# Altium PCB AltiumSTM32_PCB_2.PcbDoc
Units mm, origin at the board's own origin, x right, y up, seen from the top; angles counter-clockwise.
Board outline 35.75 x 35 mm, 4 copper layers (L1(Signal), L2(GND), L3(GND), L4(Signal)), stack 1.57 mm thick; 35 components, 27 nets, 173 pads, 116 vias.
Unrouted connection lines stored in the file: 3.
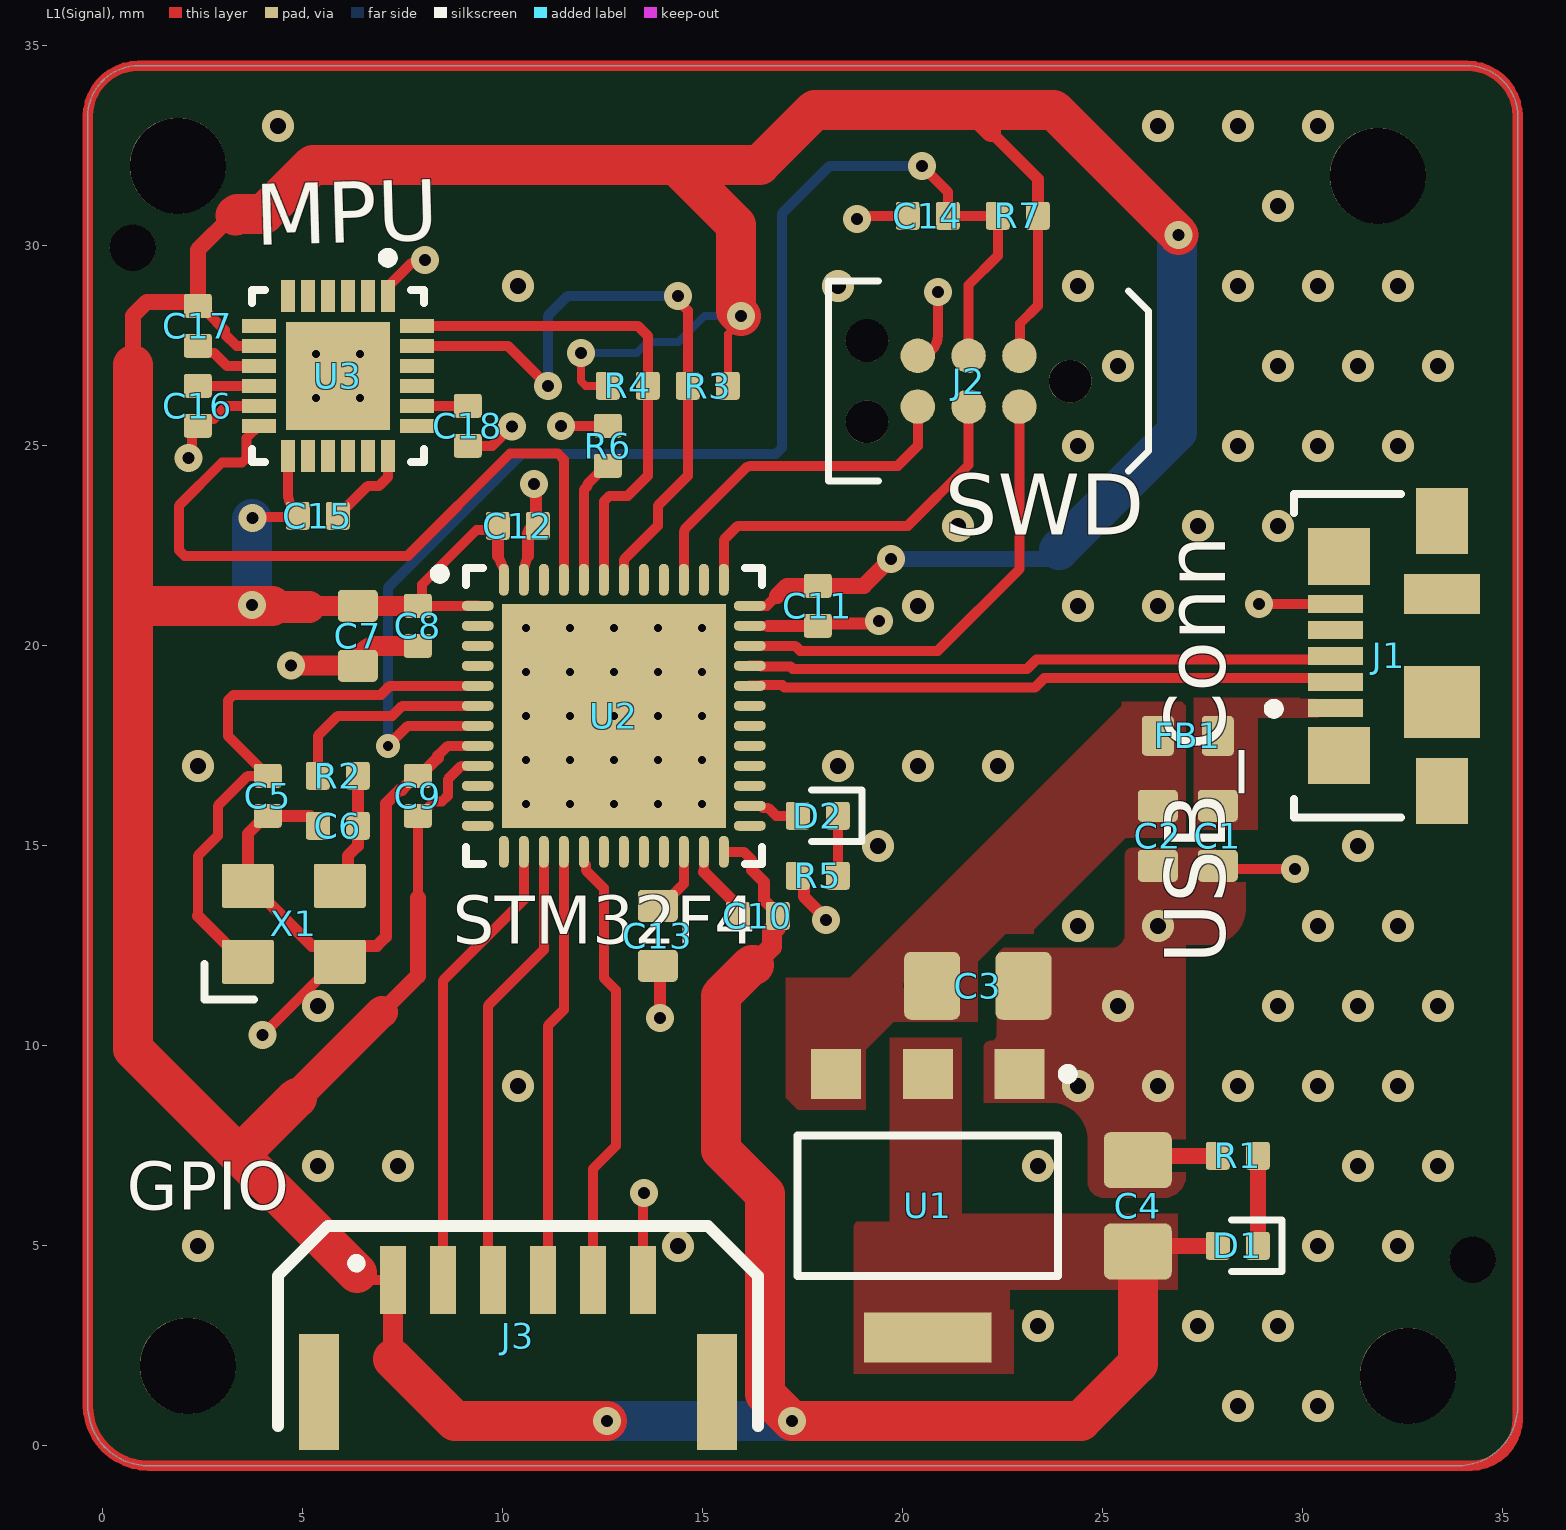
[diagram p0: L1(Signal) view]
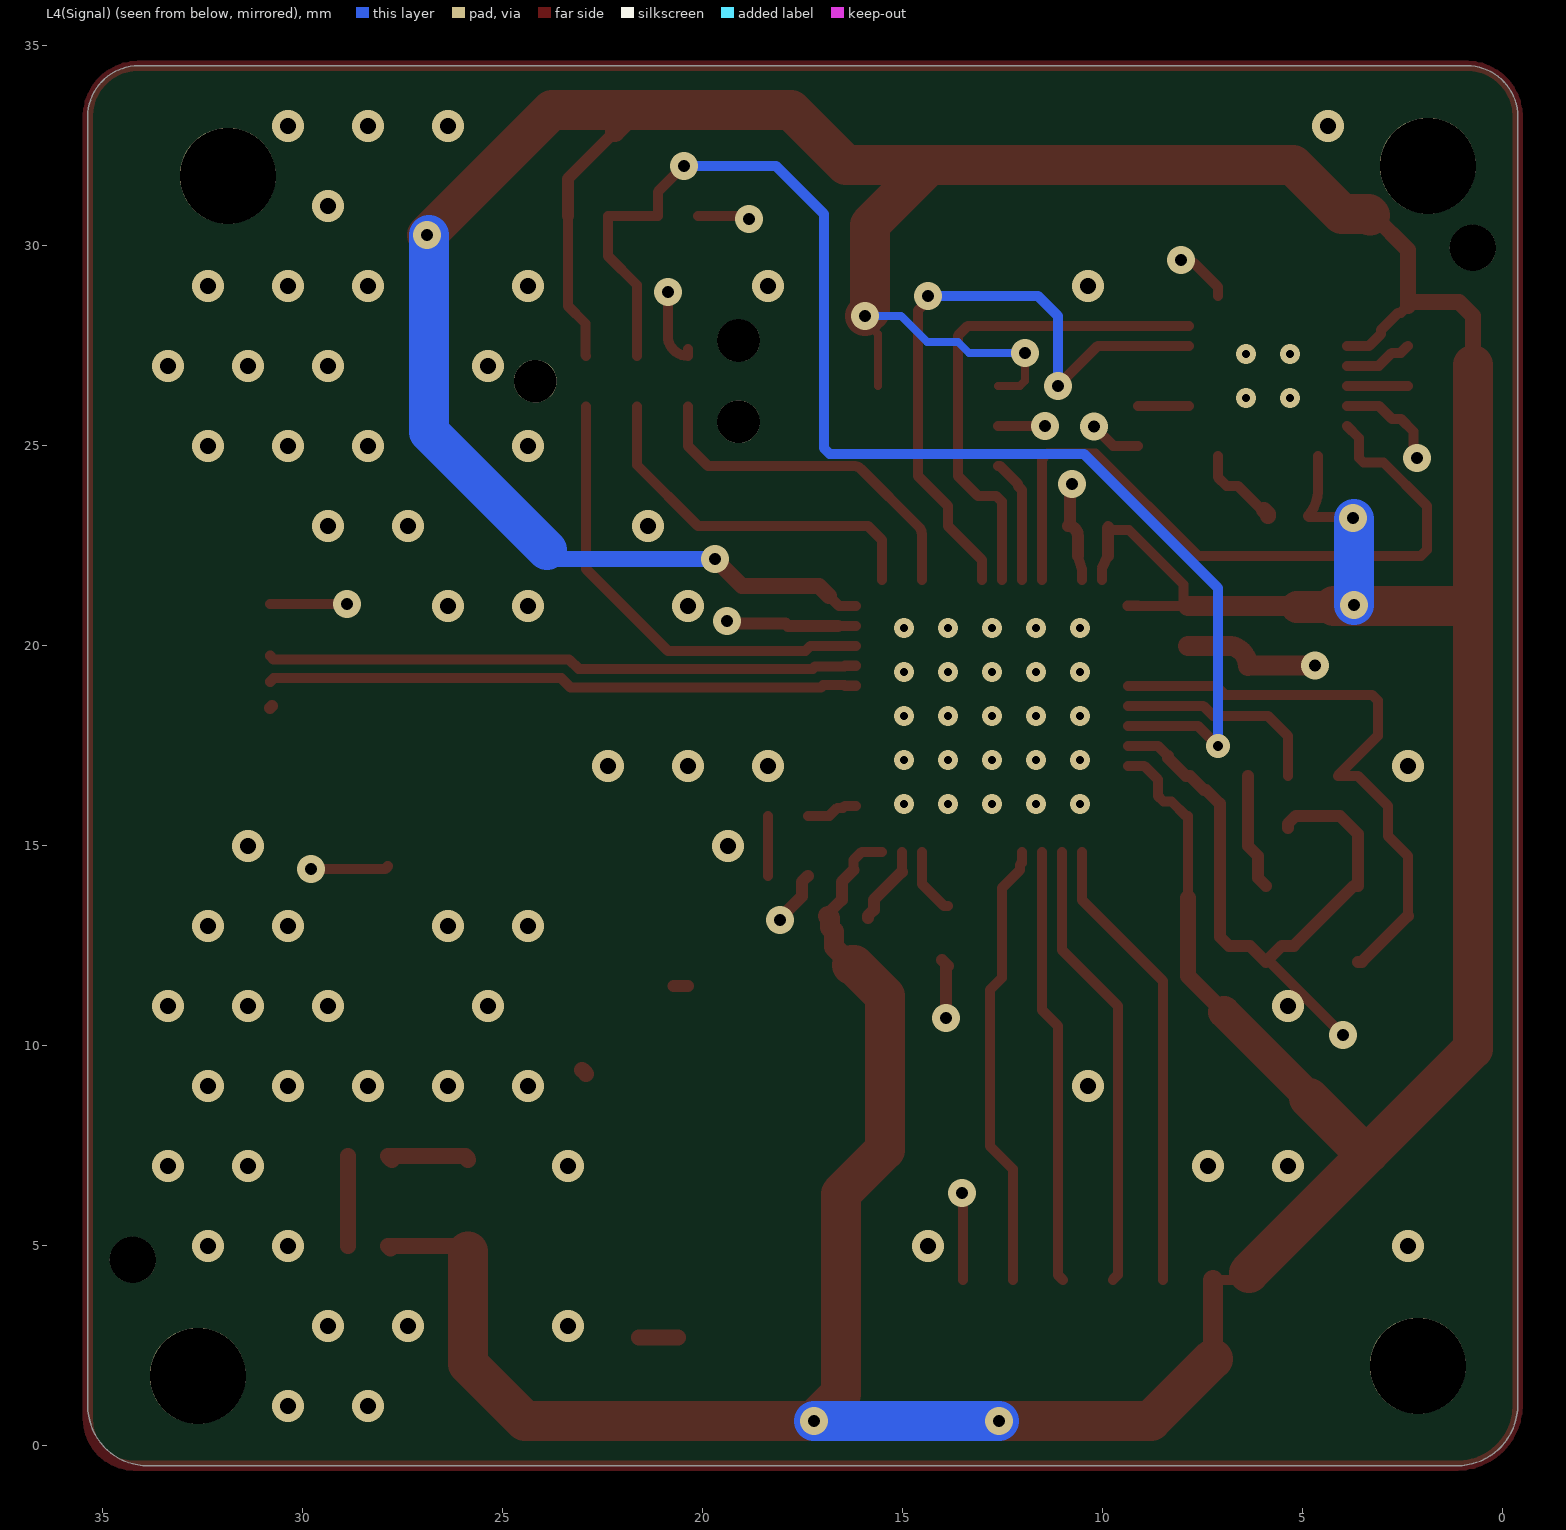
[diagram p1: L4(Signal) view, seen from below]
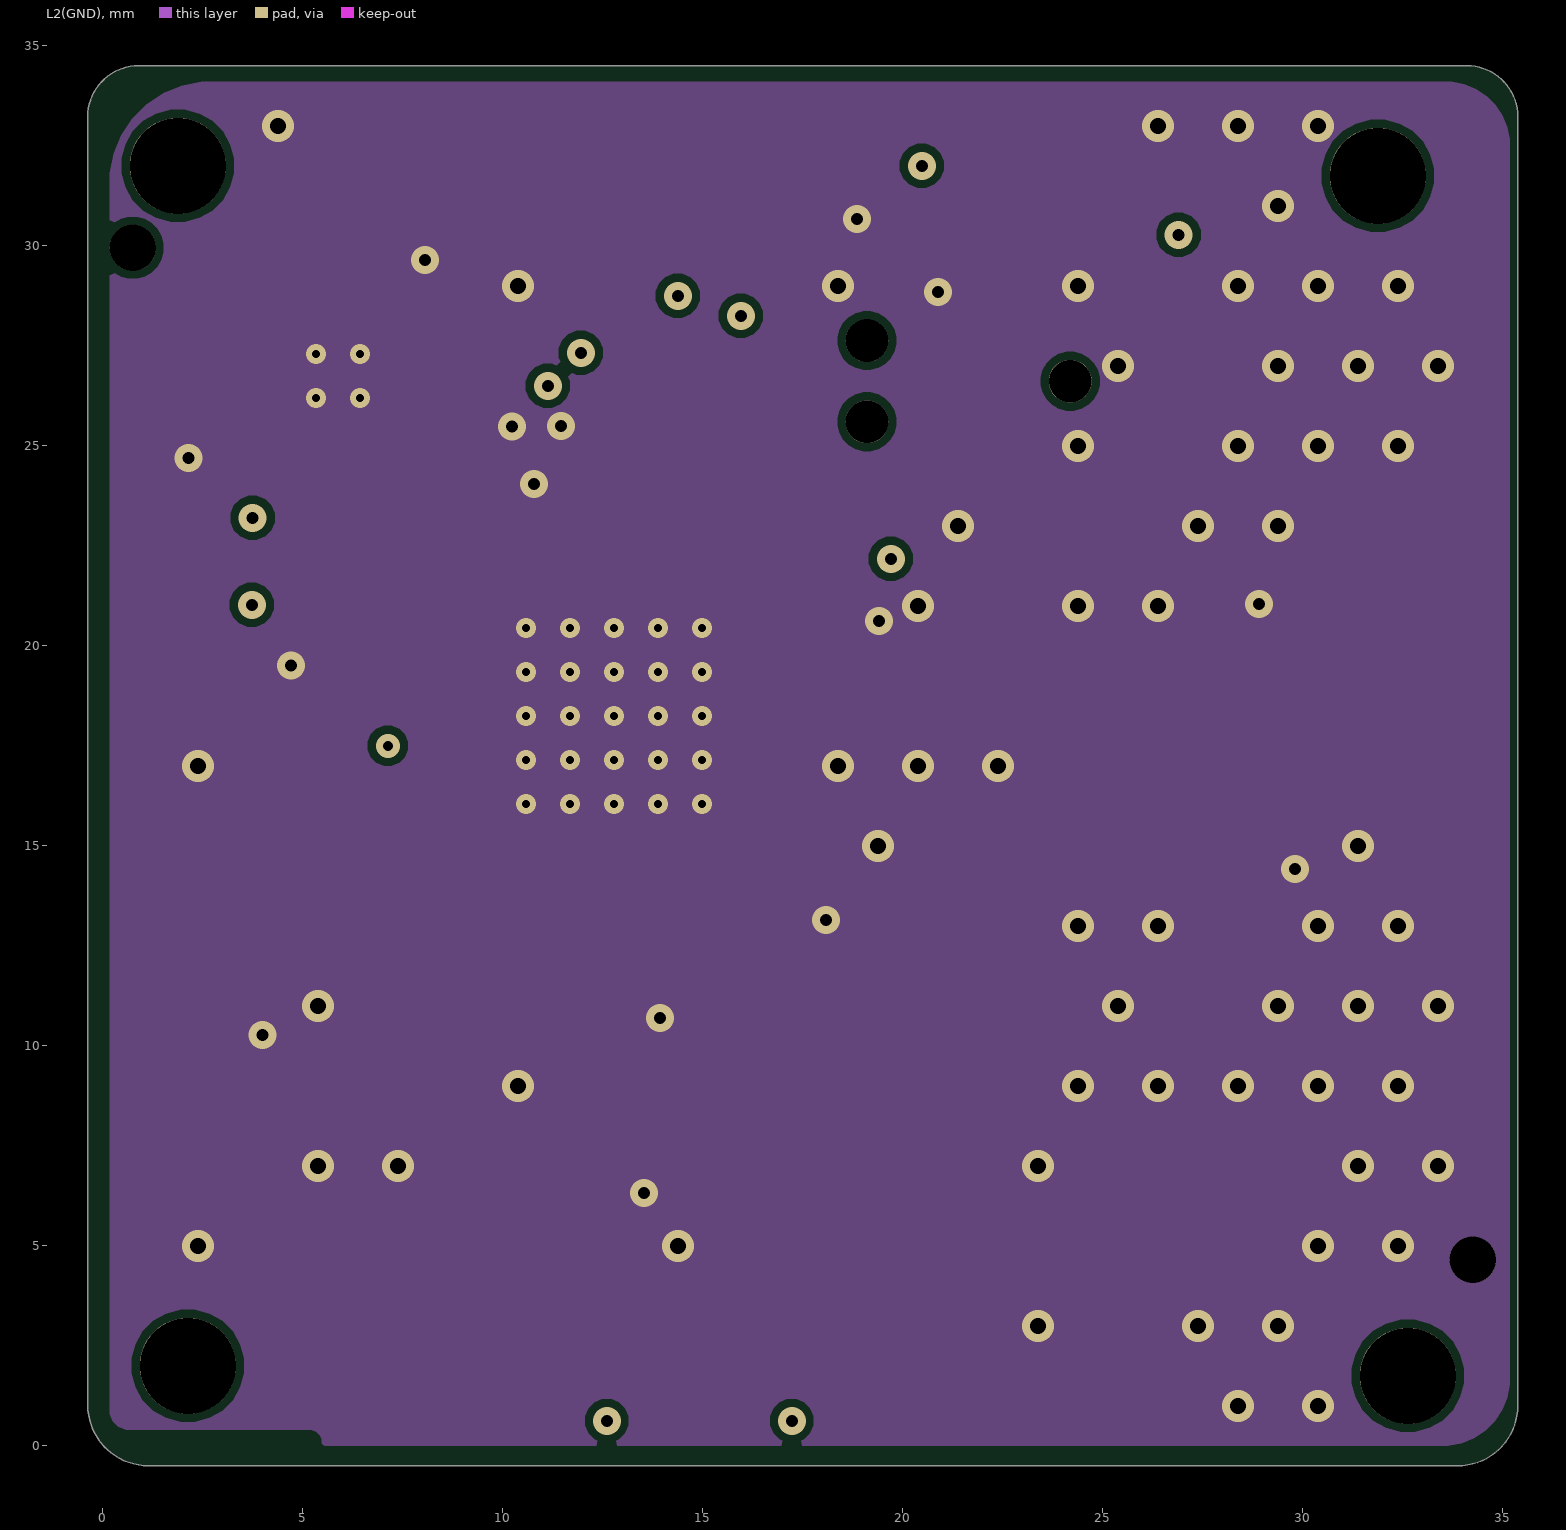
[diagram p2: L2(GND)]
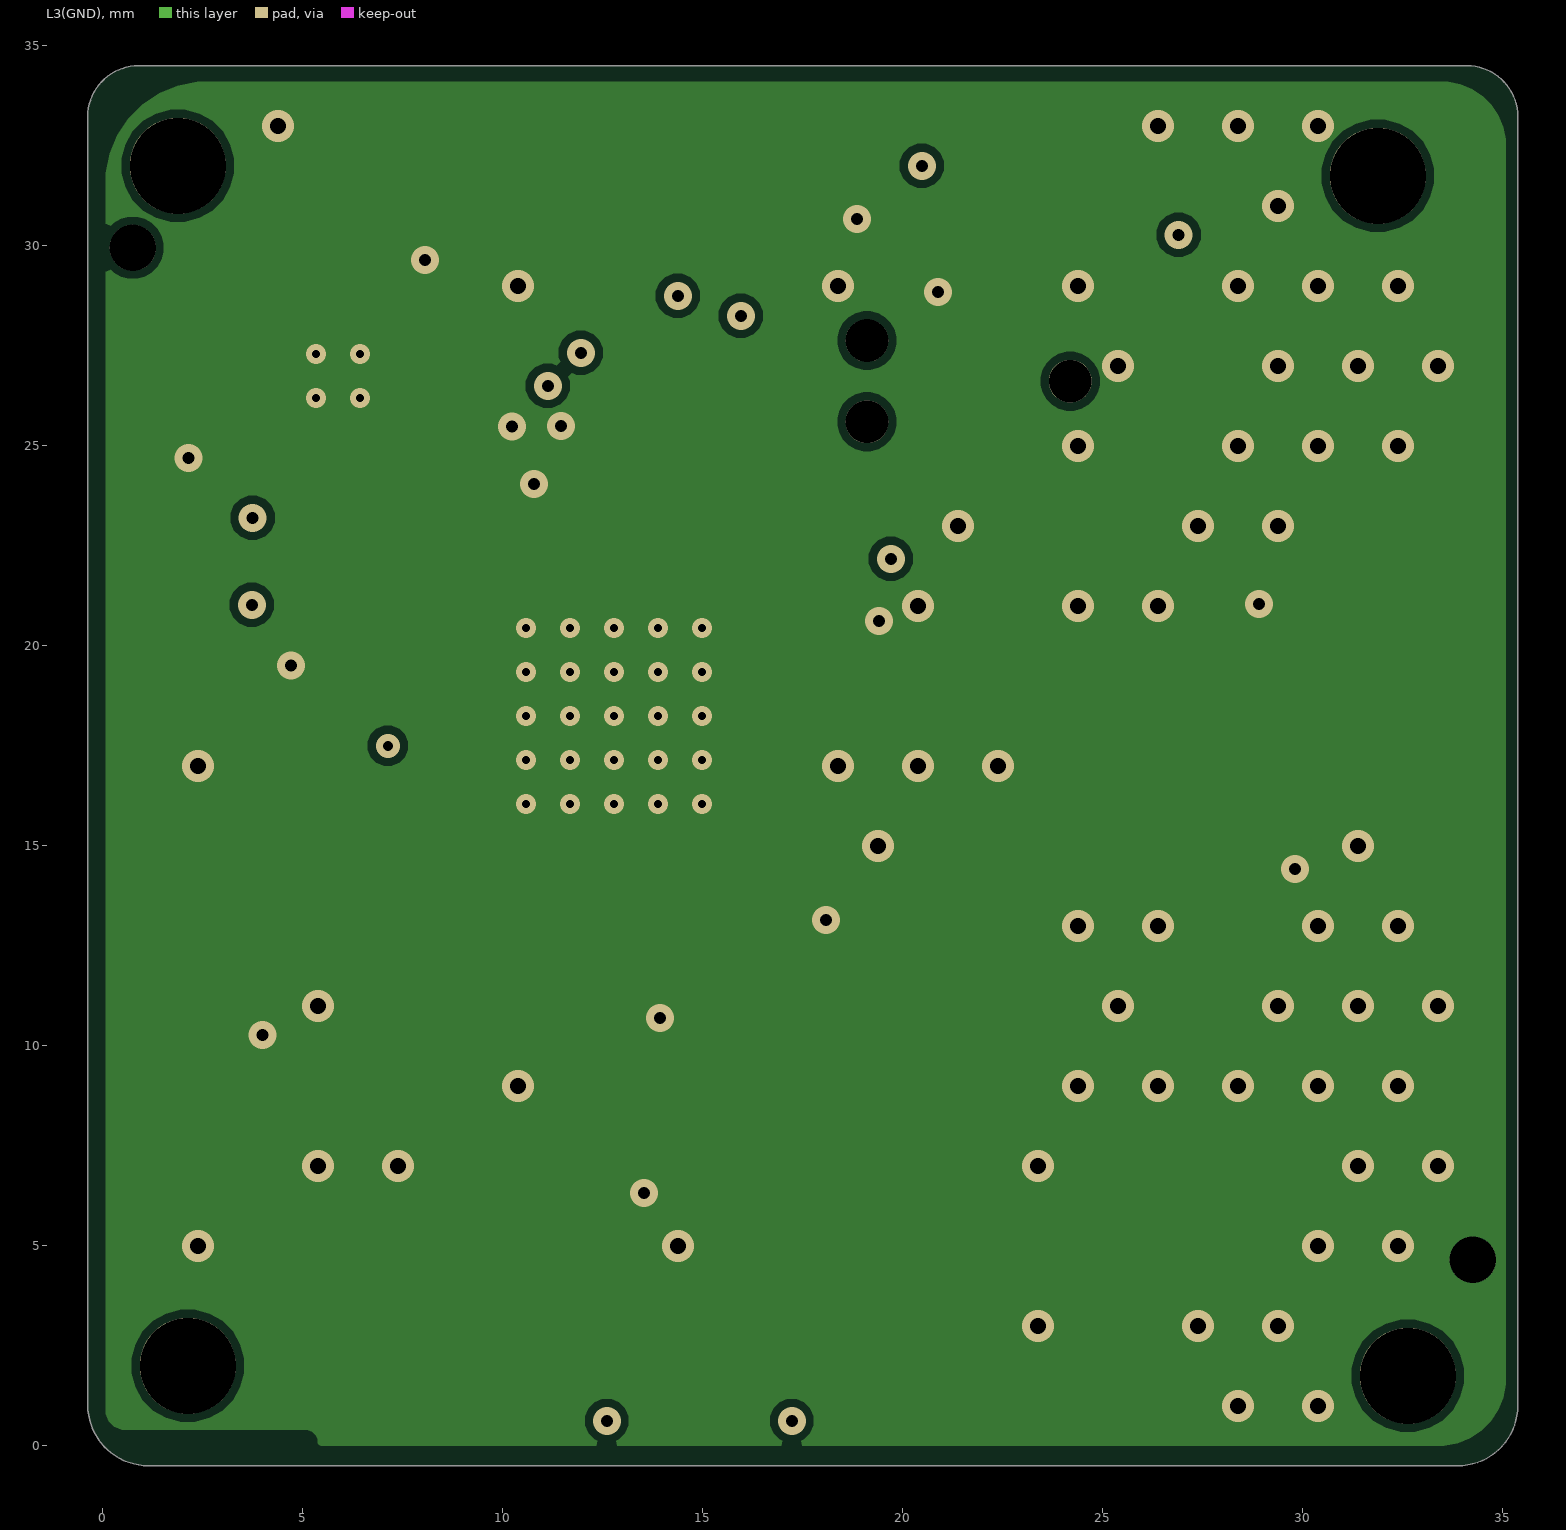
[diagram p3: L3(GND)]
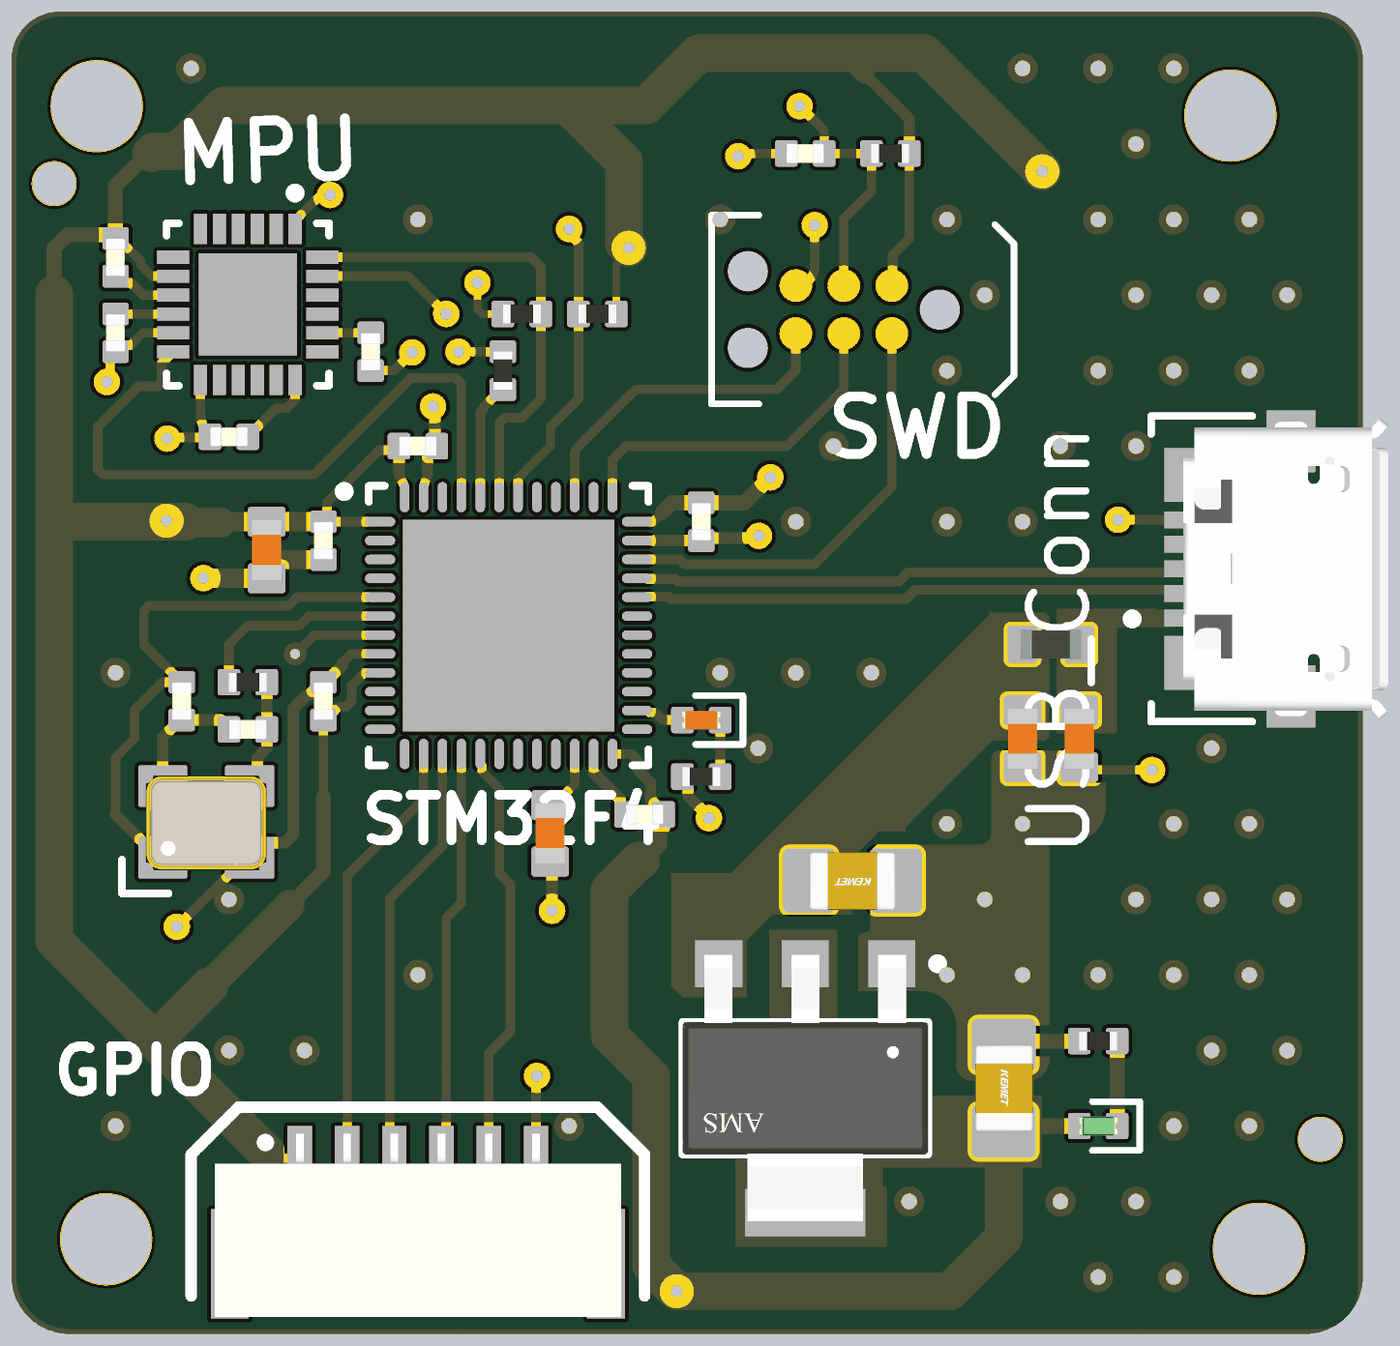
[diagram p4: 3D render of the assembled board from above, using the file's embedded part models]

## Layer stack, top to bottom
Top Solder: solder mask 0.0254, SM-001, Dk 4
L1(Signal): signal copper 0.035
Dielectric 1: prepreg 0.2, PP-017, Dk 4.6
L2(GND): signal copper 0.0175
Dielectric 3: core 1.065, Core-039, Dk 4.6
L3(GND): signal copper 0.0175
Dielectric 5: prepreg 0.2, PP-017, Dk 4.6
L4(Signal): signal copper 0.035
Bottom Solder: solder mask 0.0254, SM-001, Dk 4

## Board outline
-0.375,1.02 -0.375,33.23 cw(c0.895,33.23) 0.895,34.5 34.105,34.5 cw(c34.105,33.23) 35.375,33.23 35.375,1 cw(c33.875,1) 33.875,-0.5 1.145,-0.5 cw(c1.145,1.02)

## Design rules (kind name [scope] priority, off if disabled: settings)
Clearance [All] p1: gap=0.2 ignorepadtopadclearanceinfootprint=TRUE
DiffPairsRouting [All] p1: maxlimit=0.254 minlimit=0.203 mostfreqgap=0.254 toplayer_maxgap=0.203 toplayer_prefgap=0.203 toplayer_minwidth=0.26 toplayer_maxwidth=0.26 toplayer_prefwidth=0.26 bottomlayer_maxgap=0.203 bottomlayer_prefgap=0.203 bottomlayer_minwidth=0.26 bottomlayer_maxwidth=0.26 bottomlayer_prefwidth=0.26 impedanceprofiledriven=TRUE impedanceprofileid={13E80198-9C35-4099-81D9-022EE2CEEBF5} impedanceprofilevalue=90.000000 maxuncoupledlength=12.7
PolygonConnect [All] p1: connectstyle=Direct reliefconductorwidth=0.254 reliefentries=4 polygonreliefangle="90 Angle" airgapwidth=0.254
RoutingVias [All] p1: holewidth=0.3 width=0.7 viastyle="Through Hole" minholewidth=0.25 minwidth=0.55 maxholewidth=0.4 maxwidth=0.9
SolderMaskExpansion [All] p1: expansion=0.102 istentingtop=FALSE
Width [All] p1: maxlimit=1 minlimit=0.2 preferedwidth=0.3 midlayer1_minwidth=0.254 midlayer1_maxwidth=0.254 midlayer1_prefwidth=0.254 midlayer2_minwidth=0.254 midlayer2_maxwidth=0.254 midlayer2_prefwidth=0.254 minimp=50.000000 maximp=50.000000 favimp=50.000000
29 further rules are at their usual default settings.

## Classes and differential pairs
net class DIFF_USB: USB_D_N USB_D_P
differential pair USB_D: +USB_D_P -USB_D_N

## Components (designator, comment, footprint, x,y, rotation, side; value= is the part's Value field where it differs from the comment)
C1 "2u2" CAP_0603 27.875,15.25 r90 top
C2 "2u2" CAP_0603 26.375,15.25 r90 top
C3 "22u" CAP_0805 21.875,11.5 r180 top
C4 "22u" CAP_0805 25.875,6 r270 top
C5 "10p" CAP_0402 4.125,16.25 r90 top
C6 "10p" CAP_0402 5.875,15.5 r0 top
C7 "2u2" CAP_0603 6.375,20.25 r90 top
C8 "100n" CAP_0402 7.875,20.5 r90 top
C9 "100n" CAP_0402 7.875,16.25 r270 top
C10 "100n" CAP_0402 16.375,13.25 r0 top
C11 "100n" CAP_0402 17.875,21 r90 top
C12 "100n" CAP_0402 10.375,23 r180 top
C13 "2u2" CAP_0603 13.875,12.75 r90 top
C14 "100n" CAP_0402 20.625,30.75 r0 top
C15 "100n" CAP_0402 5.375,23.25 r180 top
C16 "100n" CAP_0402 2.375,26 r90 top
C17 "10n" CAP_0402 2.375,28 r90 top
C18 "2n2" CAP_0402 9.125,25.5 r270 top
D1 "GREEN" LED_0402_GREEN 28.375,5 r0 top
D2 "RED" LED_0402_RED 17.875,15.75 r0 top
FB1 "120R" FB_0603 27.125,17.75 r180 top
J1 "473460001" FP-473460001-MFG 33.125,19.75 r90 top
J2 "TC2030" TC2030-FP 21.645,26.615 r180 top
J3 "SM06B-GHS-TB" SM06B-GHS-TB 10.375,2.75 r0 top
R1 "1k" RES_0402 28.375,7.25 r0 top
R2 "0R" RES_0402 5.875,16.75 r180 top
R3 "2k2" RES_0402 15.125,26.5 r0 top
R4 "2k2" RES_0402 13.125,26.5 r180 top
R5 "1k" RES_0402 17.875,14.25 r0 top
R6 "10k" RES_0402 12.625,25 r270 top
R7 "10k" RES_0402 22.875,30.75 r0 top
U1 "AMS1117-3.3" FP-AMS1117-IPC_C 20.625,6 r270 top
U2 "STM32F411CEU6" STM-UFQFPN48_L 12.775,18.25 r0 top
U3 "MPU-6050" IS-QFN-24_V 5.875,26.75 r270 top
X1 "24MHz" XTAL_3225 4.775,13.05 r0 top

## Footprints (in the part's own frame and the unit in brackets; to place one, negate y for a bottom-side part, rotate by r counter-clockwise, add the part's x,y. Pads: shape width x height; smd on the part's side, far side on the other; paste and mask are expansions set on the pad)
CAP_0402 [mm]
  rrect25% 0.6x0.7 smd: 1(-0.5,0) 2(0.5,0)
  body extent -0.5,-0.26 0.5,0.26, height 0.37
CAP_0603 [mm]
  rrect25% 0.8x1 smd: 1(-0.75,0) 2(0.75,0)
  body extent -0.8,-0.4 0.8,0.4, height 0.51
CAP_0805 [mm]
  rrect25% 1.4x1.7 smd: 1(-1.143,0) 2(1.143,0)
  body extent -1.15,-0.76 1.15,0.79, height 1.01
FB_0603 [mm]
  rrect25% 0.8x1 smd: 1(-0.75,0) 2(0.75,0)
  body extent -0.8,-0.4 0.8,0.4, height 0.81
FP-473460001-MFG [mm]
  rect 0.45x1.38 smd paste+0 mask+0: 1(-1.3,2.31) 2(-0.65,2.31) 3(0,2.31) 4(0.65,2.31) 5(1.3,2.31)
  rect 1.425x1.55 smd paste+0 mask+0: 6(-2.488,2.225) 7(2.488,2.225)
  rect 1.65x1.3 smd paste+0 mask+0: 8(-3.375,-0.35) 11(3.375,-0.35)
  rect 1.8x1.9 smd paste+0 mask+0: 9(-1.15,-0.35)
  rect 1x1.9 smd paste+0 mask+0: 10(1.55,-0.35)
  silkscreen extent -4.05,0.67 4.05,3.97, body extent -4.3,-2.48 4.3,3.45, height 0.25
FP-AMS1117-IPC_C [mm]
  rect 1.25x1.25 smd paste+0 mask+0: 1(-3.295,2.29) 2(-3.295,0) 3(-3.295,-2.29)
  rect 1.25x3.182 smd paste+0 mask+0: 4(3.295,0)
  silkscreen extent -3.42,-3.25 1.75,3.63, body extent -3.9,-3.35 3.9,3.35, height 0.25
IS-QFN-24_V [mm] "QFN, 24-Leads, Body 4x4mm, Pitch 0.5mm, Thermal Pad 2.7x2.6mm"
  rect 0.8x0.35 smd: 1(-2,1.25) 2(-2,0.75) 3(-2,0.25) 4(-2,-0.25) 5(-2,-0.75) 6(-2,-1.25) 13(2,-1.25) 14(2,-0.75) 15(2,-0.25) 16(2,0.25) 17(2,0.75) 18(2,1.25)
  rect 0.35x0.85 smd mask+0.102: 7(-1.25,-1.975) 8(-0.75,-1.975) 9(-0.25,-1.975) 10(0.25,-1.975) 11(0.75,-1.975) 12(1.25,-1.975) 19(1.25,1.975) 20(0.75,1.975) 21(0.25,1.975) 22(-0.25,1.975) 23(-0.75,1.975) 24(-1.25,1.975)
  rect 2.7x2.6 smd: 25(0,0)
  silkscreen extent -3.07,-2.15 2.15,2.15, body extent -2,-2 2,2, height 0.95
LED_0402_GREEN [mm]
  rrect25% 0.6x0.7 smd: A(-0.5,0) K(0.5,0)
  silkscreen extent -0.15,-0.65 1.1,0.65, body extent -0.51,-0.25 0.51,0.25, height 0.45
LED_0402_RED [mm]
  rrect25% 0.6x0.7 smd: A(-0.5,0) K(0.5,0)
  silkscreen extent -0.15,-0.65 1.1,0.65, body extent -0.51,-0.25 0.51,0.25, height 0.45
RES_0402 [mm]
  rrect25% 0.6x0.7 smd: 1(-0.5,0) 2(0.5,0)
  body extent -0.5,-0.25 0.5,0.25, height 0.3
SM06B-GHS-TB [mm]
  rect 0.65x1.7 smd: 1(-3.125,1.4) 2(-1.875,1.4) 3(-0.625,1.4) 4(0.625,1.4) 5(1.875,1.4) 6(3.125,1.4)
  rect 1x2.9 smd: ""(-4.975,-1.4) ""(4.975,-1.4)
  silkscreen extent -6,-2.25 6,2.75, body extent -5.38,-2.8 5.38,2.05, height 4.26
STM-UFQFPN48_L [mm] "QFN, 48-Leads, Body 7.1x7.1mm, Pitch 0.5mm, Thermal Pad 5.6x5.6mm, IPC High Density"
  oval 0.8x0.25 smd: 1(-3.4,2.75) 2(-3.4,2.25) 3(-3.4,1.75) 4(-3.4,1.25) 5(-3.4,0.75) 6(-3.4,0.25) 7(-3.4,-0.25) 8(-3.4,-0.75) 9(-3.4,-1.25) 10(-3.4,-1.75) 11(-3.4,-2.25) 12(-3.4,-2.75) 25(3.4,-2.75) 26(3.4,-2.25) 27(3.4,-1.75) 28(3.4,-1.25) 29(3.4,-0.75) 30(3.4,-0.25) 31(3.4,0.25) 32(3.4,0.75) 33(3.4,1.25) 34(3.4,1.75) 35(3.4,2.25) 36(3.4,2.75)
  oval 0.25x0.8 smd: 13(-2.75,-3.4) 14(-2.25,-3.4) 15(-1.75,-3.4) 16(-1.25,-3.4) 17(-0.75,-3.4) 18(-0.25,-3.4) 19(0.25,-3.4) 20(0.75,-3.4) 21(1.25,-3.4) 22(1.75,-3.4) 23(2.25,-3.4) 24(2.75,-3.4) 37(2.75,3.4) 38(2.25,3.4) 39(1.75,3.4) 40(1.25,3.4) 41(0.75,3.4) 42(0.25,3.4) 43(-0.25,3.4) 44(-0.75,3.4) 45(-1.25,3.4) 46(-1.75,3.4) 47(-2.25,3.4) 48(-2.75,3.4)
  rect 5.6x5.6 smd: 49(0,0)
  silkscreen extent -4.47,-3.7 3.7,3.7, body extent -3.55,-3.55 3.55,3.55, height 0.6
TC2030-FP [mil]
  round 33.98 smd paste-17.01: 1(-50,-25) 2(-50,25) 3(0,-25) 4(0,25) 5(50,-25) 6(50,25)
  round 42.01 hole 42.01 unplated: MH(-100,0) MH(100,-40) MH(100,40)
  silkscreen extent -177,-98 138,98
XTAL_3225 [mm]
  rrect10% 1.3x1.1 smd: 1(-1.15,-0.95) 2(1.15,-0.95) 3(1.15,0.95) 4(-1.15,0.95)
  silkscreen extent -2.23,-1.89 -1,-1, body extent -1.6,-1.28 1.6,1.22, height 0.61

## Part data
C1 C2 C7 C13: library part CAP_0603, "Capacitor SMD 0603"
C3 C4: library part CAP_0805, "Capacitor SMD 0805"
C5 C6 C8 C9 C10 C11 C12 C14 C15 C16 C17 C18: library part CAP_0402, "Capacitor SMD 0402"
D1: library part LED_0402_GREEN, "LED 0402 GREEN SMD"
D2: library part LED_0402_RED, "LED 0402 RED SMD"
FB1: library part FB_0603, "Ferrite Bead SMD 0603"
J1: library part CMP-2000-05246-2, "CONN RCPT USB2.0 MICRO B SMD R/A", Current Rating=1.8A, Manufacturer=Molex, Package=0, Temperature="-30°C to +85°C", Temperature Range High=+85°C, Temperature Range Low=-30°C, Voltage Rating=30V, Automotive=No, Category=Conn, ComponentLink2Description=Datasheet, ComponentLink2URL=https://www.molex.com/webdocs/datasheets/pdf/en-us/0473460001_IO_CONNECTORS.pdf, Conn Orientation="Right Angle", Contact Material=Gold,Nickel, Device Class L1=Connectors, Device Class L2="USB Connectors", Device Class L3=unset, Digikey Description="CONN RCPT USB2.0 MICRO B SMD R/A", Footprint Url=https://www.molex.com/pdm_docs/sd/473460001_sd.pdf, Height=2.945mm, Is Female=yes, Lead Free=Yes, Manufacturer Part Number=473460001, Number Of Contacts=5, Octopart=https://octopart.com/47346-0001-molex-7164928, Pitch=0.65mm, RoHS=TRUE, Shielding=true, Usb Standard="USB 2.0"
J2: "Tag-Connect No-Solder SWD Debug Connector DO NOT PLACE", Manufacturer=Tag-Connect, Manufacturer Part Number=TC2030
J3: "Header Connector 6 Position 1.25MM Pitch SMD Horizontal JST GH", Manufacturer=JST, Manufacturer Part Number=SM06B-GHS-TB
R1 R2 R3 R4 R5 R6 R7: library part RES_0402, "Resistor SMD 0402"
U1: library part CMP-209535-000001-1, "LDO Voltage Regulators 1A, 3.3V", Dropout Voltage=1.1V, Manufacturer="Advanced Monolithic Systems", Max Junction Temp=+125°C, Max Power Dissipation=1.2W, Max Supply Voltage=15V, Nominal Supply Current=5mA, Output Current=1A, Output Voltage=3.3V, Package=AMS1117, Temperature="-40°C to +125°C", Temperature Range Low=-40°C, Automotive=No, Category=IC, ComponentLink2Description=Datasheet, ComponentLink2URL=http://www.advanced-monolithic.com/pdf/ds1117.pdf, Device Class L1="Integrated Circuits (ICs)", Device Class L2="Power Management ICs", Device Class L3="Voltage Regulators - Linear", Height=1.8mm, Ipc Land Pattern Name=SOT229P700X180-4, Lead Free=Yes, Manufacturer Part Number=AMS1117-3.3, Number Of Outputs=1, Octopart=https://octopart.com/ams1117-3.3-advanced+monolithic+systems-25899300, Output Type=Fixed, RoHS=TRUE, Standoff Height=0.64mm, Temperature Range High=+125°C
U2: library part CMP-0243-00165-1, "ARM Cortex-M4 32-bit MCU+FPU, 512 KB Flash, 128 KB RAM, 36 I/Os, 48-Pin UFQFPN, -40 to 85 degC, Tray", I/Os (High Current)=36, Operating Frequency(F) (Processor speed) (MHz)=100, Package Description=UFQFPN48, Package Reference="48-Pin Ultra Thin Fine Pitch Quad Flat No-Lead, 7 x 7 x 0.6 mm Body, 0.5 mm Pitch, Exposed Pad", Supply Voltage(Vcc) min (V)=1.7, ComponentLink1Description="Manufacturer URL", ComponentLink1URL=http://www.st.com/, ComponentLink2Description=Datasheet, ComponentLink2URL=http://www.st.com/st-web-ui/static/active/en/resource/technical/document/datasheet/DM00115249.pdf, Core="ARM Cortex-M4", DatasheetVersion="Rev. 6", FLASH Size (Prog) (kB)=512, Internal RAM Size (kB)=128, Mounting Technology="Surface Mount", Packing=Tray
U3: library part CMP-1753-00002-2, "3-Axis Gyroscope, Accelerometer and a Digital Motion Processor(TM) (DMP), 2.375 to 3.46 V, -40 to 85 degC, 24-Pin QFN, RoHS, Tape and Reel", Manufacturer=InvenSense, Standard Package=5,000, Category=Sensors,Transducers, Datasheet URL=http://datasheet.octopart.com/MPU-6050-InvenSense-datasheet-14421344.pdf, Datasheet Version="Rev. 3.3, 05/2012", Dynamic Catalog=MPU-6000™Series, Family=Multifunction, Featured Product=MPU-60506-Axis,IntegratedI²CSolution, Manufacturer URL=http://www.invensense.com/, Online Catalog=MPU-6000™Series, Other Names="1428-1007-2 / MPU6050", Output Type=Digital, Sensor Type=MotionTracking, Unit PriceUSD=Digital
X1: library part TSX-3225_24.0000MF15X-AC, "Crystal SMD 24MHz 10PPM 7pF 3225", Manufacturer=Epson, Manufacturer Part Number="TSX-3225 24.0000MF15X-AC"

## Free pads (board coordinates)
  round 2.4 hole 2.4: MH(1.875,32) MH(2.125,2) MH(31.875,31.75) MH(32.625,1.75)
  round 1.152 hole 1.152: TH(-92.473,-69.848) TH(0.75,29.95) TH(34.25,4.65)

## Via types
v1: diameter 0.8, hole 0.4, L1(Signal) to L4(Signal), tented both sides, 60 vias
v2: diameter 0.5, hole 0.2, L1(Signal) to L4(Signal), 29 vias
v3: diameter 0.7, hole 0.3, L1(Signal) to L4(Signal), 25 vias
v4: diameter 0.7/0.7/0.7/0.7 (per signal layer), hole 0.3, L1(Signal) to L4(Signal), 1 vias
v5: diameter 0.6/0.6/0.6/0.6 (per signal layer), hole 0.25, L1(Signal) to L4(Signal), tented top, 1 vias

## Nets (pads, with @x,y where several pads share a name; then routed paths per layer and width w, separated by ;. In a path a pad name is that pad's centre, name@x,y a point inside that pad or via, vN(x,y) a via of type N, cw(c..) or ccw(c..) an arc to the next point about the centre after c; other vN are vias at no path point)
+3V3: C4.2 C7.2 C8.2 C9.2 C10.2 C11.2 C12.2 C15.2 C17.2 D1.A J2.1 J3.1 R3.2 R4.2 R7.2 U1.2 U1.4 U2.1 U2.9 U2.24 U2.36 U2.48 U3.8 U3.13 | length 171.1
  L1(Signal) w0.2: v3(11.95,27.325) 11.95,26.617 12.067,26.5 R4.2 ; R3.2 15.625,27.79 15.95,28.115 v3(15.95,28.25)
  L1(Signal) w0.25: C17.2 2.55,28.325 2.616,28.325 3.05,27.891 3.05,27.79 3.34,27.5 U3.8 ; v3(3.745,23.2) 3.77,23.225 4.85,23.225 C15.2 cw(c5.479,23.854) 4.625,23.854 U3.13 ; 6.35,4.325 6.35,4.296 6.496,4.15 J3.1 ; 7.875,13.7 C9.2 ; C9.2@7.925,15.75 8.279,16.104 8.479,16.104 8.625,16.25 8.625,16.661 8.964,17 U2.9 ; U2.1@9.125,21 C8.2 7.979,21.104 7.979,21.529 9.346,22.896 9.771,22.896 C12.2 C12.2@9.875,22.95 ; 9.875,22.25 10.025,21.925 U2.48 ; U2.24 16.025,14.85 16.226,14.649 16.226,14.399 ; U2.36 16.6,21 16.85,21.25 ; J2.1 22.931,27.266 22.931,28.056 23.375,28.5 R7.2
  L1(Signal) w0.26: U2.1@9.125,21 U2.1
  L1(Signal) w0.3: 9.875,22.25 C12.2@9.875,22.95 ; 16.226,14.399 16.525,14.1 16.525,13.65 16.875,13.3 C10.2 ; 22.2,32.85 23.375,31.675 R7.2
  L1(Signal) w0.4: 0.75,27.025 0.75,28.25 1.1,28.6 2.275,28.6 C17.2 2.375,29.9 3.231,30.756 3.319,30.756 ; 6.975,10.85 7.875,11.75 7.875,13.7 ; 16.85,21.25 17.1,21.5 19.025,21.5 v3(19.7,22.175) ; U1.4 U1.4@21.591,2.705 ; C4.2 25.875,5 D1.A D1.A@27.804,4.929
  L1(Signal) w0.5: 5.15,20.975 5.175,21 C7.2 C8.2 ; 7.25,2.175 J3.1 ; 16.275,12.025 16.725,12.475 16.725,12.857 16.825,12.957 16.825,13.2 C10.2 ; 21.65,33.4 22.2,32.85
  L1(Signal) w0.8: 4.225,21 4.25,20.975 5.15,20.975 ; 4.85,8.7 4.85,8.725 6.975,10.85
  L1(Signal) w1: 0.75,27.025 0.75,21 ; 3.319,30.756 3.362,30.8 4.025,30.8 5.25,32.025 14.325,32.025 ; 4.225,21 0.75,21 ; 4.85,8.7 3.475,7.325 3.35,7.325 ; 6.35,4.325 3.35,7.325 ; 7.25,2.175 8.8,0.625 v3(12.6,0.625) ; v3(15.95,28.25) 15.825,28.375 15.825,30.525 14.325,32.025 ; 16.275,12.025 16.225,12.025 15.45,11.25 15.45,7.4 16.55,6.3 16.55,1.3 v3(17.225,0.625) 24.45,0.625 25.875,2.05 C4.2 ; v3(26.895,30.275) 23.77,33.4 21.65,33.4 17.8,33.4 16.425,32.025 14.325,32.025 ; 0.75,21 0.75,9.925 3.35,7.325
  L4(Signal) w0.2: v3(11.95,27.325) 13.35,27.325 13.625,27.6 14.395,27.6 15.045,28.25 v3(15.95,28.25)
  L4(Signal) w0.4: v3(19.7,22.175) 23.675,22.175 23.9,22.4
  L4(Signal) w1: v3(3.725,21.025) v3@3.725,23.171 ; v3(12.6,0.625) v3(17.225,0.625) ; 23.9,22.4 26.85,25.35 v3@26.85,30.275
+5V: C2.2 C3.2 FB1.2 U1.3 | length 0.4
  L1(Signal) w0.3: C3.2@20.375,11.5 C3.2
GND: C1.1 C2.1 C3.1 C4.1 C5.1 C6.1 C7.1 C8.1 C9.1 C10.1 C11.1 C12.1 C13.1 C14.1 C15.1 C16.1 C17.1 C18.2 J1.5 J2.5 J3.6 pad.TH@34.25,4.65 R1.1 R5.1 R6.1 U1.1 U2.8 U2.23 U2.35 U2.47 U2.49 U3.1 U3.9 U3.11 U3.18 U3.25 X1.2 X1.4 | length 53.6
  L1(Signal) w0.25: v4(2.145,24.7) 2.231,24.786 2.231,25.356 2.55,25.675 2.775,25.675 3.1,26 U3.11 ; C17.1 2.55,27.325 2.775,27.325 3.1,27 U3.9 ; v3(3.995,10.275) 4,10.275 5.825,12.1 X1.2 ; C15.1 6.625,24 6.91,24 7.125,24.215 U3.18 ; U3.1 7.125,28.975 7.714,29.564 7.964,29.564 v3(8.05,29.65) ; 8.375,17.25 8.625,17.5 U2.8 ; C18.2 9.739,25 10.219,25.481 v3(10.225,25.481) ; U2.47 10.525,21.925 10.625,22.25 ; v3(11.45,25.5) R6.1 ; J3.6 13.5,6.3 cw(c13.525,6.3) v3(13.525,6.325) ; 15.025,14.35 U2.23 ; U2.35 16.625,20.5 ; v3(18.85,30.675) cw(c18.925,30.675) 18.925,30.75 C14.1 ; J2.5@20.375,27.416 J2.5 ccw(c20.375,27.75) 20.875,27.75 v3(20.875,28.85) ; C1.1 ccw(c27.95,14.5) 27.95,14.425 v3(29.8,14.425) ; v3(28.9,21.05) J1.5
  L1(Signal) w0.3: C6.1@5.375,15.45 C6.1 5.375,15.55 5.175,15.75 C5.1 4.075,15.75 3.625,15.3 X1.4 3.725,14 5.225,12.5 5.525,12.5 X1.2 6.325,12.5 6.85,12.5 7.075,12.725 7.075,16.051 7.424,16.4 7.475,16.4 7.825,16.75 C9.1 7.925,16.75 8.375,17.2 8.375,17.25 ; 10.625,22.25 10.625,22.75 cw(c10.875,22.75) C12.1 10.825,23.05 10.825,24 v3(10.775,24.05) ; v3(13.925,10.7) 13.925,11.95 ccw(c13.875,11.95) C13.1 C13.1@14.025,12.15 ; 15.025,14.35 15.725,13.65 15.725,13.4 C10.1 C10.1@15.875,13.2 ; 16.625,20.5 C11.1 17.938,20.562 19.337,20.562 v3(19.4,20.625) ; R5.1 17.525,14.1 17.525,13.731 18.075,13.181 v3(18.075,13.15)
  L1(Signal) w0.4: C15.1 5.875,23.3 C15.1@5.975,23.4 ; U1.1 U1.1@23.018,9.398 ; C4.1 cw(c25.982,7.143) 25.982,7.25 R1.1 27.875,7.243 R1.1@27.775,7.143
  L1(Signal) w0.5: v3(4.7,19.506) 4.703,19.503 6.372,19.503 C7.1 cw(c6.875,19.5) 6.875,20 C8.1
  other v1: 28.375,1 30.375,1 23.375,3 27.375,3 29.375,3 2.375,5 14.375,5 30.375,5 32.375,5 5.375,7 7.375,7 23.375,7 31.375,7 33.375,7 10.375,9 24.375,9 26.375,9 28.375,9 30.375,9 32.375,9 5.375,11 25.375,11 29.375,11 31.375,11 33.375,11 24.375,13 26.375,13 30.375,13 32.375,13 19.375,15 31.375,15 2.375,17 18.375,17 20.375,17 22.375,17 20.375,21 24.375,21 26.375,21 21.375,23 27.375,23 29.375,23 24.375,25 28.375,25 30.375,25 32.375,25 25.375,27 29.375,27 31.375,27 33.375,27 10.375,29 18.375,29 24.375,29 28.375,29 30.375,29 32.375,29 29.375,31 4.375,33 26.375,33 28.375,33 30.375,33
  other v2: 10.575,16.05 11.675,16.05 12.775,16.05 13.875,16.05 14.975,16.05 10.575,17.15 11.675,17.15 12.775,17.15 13.875,17.15 14.975,17.15 10.575,18.25 11.675,18.25 12.775,18.25 13.875,18.25 14.975,18.25 10.575,19.35 11.675,19.35 12.775,19.35 13.875,19.35 14.975,19.35 10.575,20.45 11.675,20.45 12.775,20.45 13.875,20.45 14.975,20.45 5.325,26.2 6.425,26.2 5.325,27.3 6.425,27.3
IMU_CPOUT: C18.1 U3.20 | length 1.3
  L1(Signal) w0.25: U3.20 C18.1
IMU_INT: U2.45 U3.12 | length 18
  L1(Signal) w0.25: U3.12 3.594,25.194 3.594,24.694 3.481,24.581 2.981,24.581 1.9,23.5 1.9,22.396 2.046,22.25 7.625,22.25 10.181,24.806 11.379,24.806 11.525,24.659 U2.45
IMU_REGOUT: C16.2 U3.10 | length 1.5
  L1(Signal) w0.25: C16.2 U3.10
IMU_SCL: R3.1 U2.42 U3.23 | length 16.8
  L1(Signal) w0.25: U3.23 10.125,27.5 v3(11.125,26.5) ; U2.42 13.025,22.15 13.875,23 13.875,23.5 14.625,24.25 R3.1 14.625,28.378 14.375,28.628 v3(14.375,28.75)
  L4(Signal) w0.25: v3(11.125,26.5) 11.125,28.25 11.625,28.75 v3(14.375,28.75)
IMU_SDA: R4.1 U2.43 U3.24 | length 12.7
  L1(Signal) w0.25: U3.24 13.375,28 13.625,27.75 R4.1 13.625,24.25 13.125,23.75 12.671,23.75 12.525,23.604 U2.43
LED_PWR_K: D1.K R1.2 | length 2.3
  L1(Signal) w0.4: D1.K R1.2
MCU_BOOT0: R6.2 U2.44 | length 3.1
  L1(Signal) w0.25: U2.44 12.025,23.9 12.124,23.999 12.124,24.049 12.575,24.5 R6.2
MCU_LED_A: D2.A U2.26 | length 1.3
  L1(Signal) w0.25: U2.26 16.45,16 16.5,15.95 16.636,15.95 16.836,15.75 D2.A
MCU_LED_K: D2.K R5.2 | length 1.5
  L1(Signal) w0.25: R5.2 18.375,15 D2.K
MCU_NRST: C14.2 J2.3 R7.1 U2.7 | length 34.1
  L1(Signal) w0.25: v5(7.125,17.5) 7.625,18 U2.7 ; v3(20.475,32) 21.125,31.35 C14.2 R7.1 22.375,29.75 21.645,29.02 J2.3
  L4(Signal) w0.25: v5(7.125,17.5) 7.125,21.45 10.475,24.8 16.829,24.8 16.975,24.946 16.975,30.8 18.175,32 v3(20.475,32)
MCU_OSC_IN: C5.2 U2.5 X1.1 | length 14.9
  L1(Signal) w0.25: 2.375,13.25 2.375,14.75 2.875,15.25 2.875,16 3.625,16.75 C5.2 3.125,17.75 3.125,18.629 3.271,18.775 6.951,18.775 7.176,19 U2.5
  L1(Signal) w0.3: 2.375,13.25 3.525,12.1 X1.1
MCU_OSC_OUT: R2.2 U2.6 | length 5.3
  L1(Signal) w0.25: R2.2 5.375,17.75 5.875,18.25 7.239,18.25 7.489,18.5 U2.6
MCU_PA4: J3.2 U2.14 | length 11.5
  L1(Signal) w0.25: J3.2 8.5,11.625 10.525,13.65 U2.14
MCU_PA5: J3.3 U2.15 | length 11.3
  L1(Signal) w0.25: J3.3 9.625,4.275 9.625,11 11.025,12.4 U2.15
MCU_PA6: J3.4 U2.16 | length 10.9
  L1(Signal) w0.25: J3.4 11.125,4.275 11.125,10.5 11.525,10.9 U2.16
MCU_PA7: J3.5 U2.17 | length 11.3
  L1(Signal) w0.25: U2.17 12.025,14.575 12.075,14.525 12.075,14.389 12.525,13.939 12.525,11.691 12.825,11.391 12.825,7.497 12.25,6.922 J3.5
MCU_SWCLK: J2.4 U2.37 | length 9.4
  L1(Signal) w0.25: U2.37 15.525,22.65 15.875,23 20.125,23 21.645,24.52 J2.4
MCU_SWDIO: J2.2 U2.34 | length 11.7
  L1(Signal) w0.25: U2.34 17.309,20 17.434,19.875 20.875,19.875 22.915,21.915 J2.2
MCU_SWO: J2.6 U2.39 | length 8.9
  L1(Signal) w0.25: U2.39 14.525,22.796 cw(c14.775,22.796) 14.598,22.973 16.052,24.427 cw(c16.229,24.25) 16.229,24.5 19.875,24.5 20.375,25 J2.6
MCU_VCAP1: C13.2 U2.22 | length 1.7
  L1(Signal) w0.25: C13.2 13.975,13.5 14.525,14.05 U2.22
USB_D_N: J1.2 U2.32 | length 14.8
  L1(Signal) w0.26: U2.32 16.44,19 16.458,19.018 16.992,19.018 17.054,18.957 23.298,18.957 23.535,19.193 30.722,19.193 J1.2
USB_D_P: J1.3 U2.33 | length 14.8
  L1(Signal) w0.26: U2.33 16.44,19.5 16.458,19.482 17.184,19.482 17.246,19.42 23.106,19.42 23.343,19.657 30.722,19.657 J1.3
VBUS: C1.2 FB1.1 J1.1 | length 0.1
  L1(Signal) w0.3: J1.1@30.765,18.5 J1.1
XTAL_IN: C6.2 R2.1 X1.3 | length 2.9
  L1(Signal) w0.3: X1.3 6.125,14.2 6.125,14.75 6.375,15 C6.2 R2.1
pads on no net: J1.4 J1.6 J1.7 J1.8 J1.9 J1.10 J1.11 J2.MH J3. U2.2 U2.3 U2.4 U2.10 U2.11 U2.12 U2.13 U2.18 U2.19 U2.20 U2.21 U2.25 U2.27 U2.28 U2.29 U2.30 U2.31 U2.38 U2.40 U2.41 U2.46 U3.2 U3.3 U3.4 U3.5 U3.6 U3.7 U3.14 U3.15 U3.16 U3.17 U3.19 U3.21 U3.22
copper on no net: | length 139.3
  L1(Signal) w0.254: -0.375,1.02 ccw(c1.145,1.02) 1.145,-0.5 34.201,-0.5 ccw(c34.201,0.674) 35.375,0.674 35.375,33.23 ccw(c34.105,33.23) 34.105,34.5 1.875,34.5 0.895,34.5 ccw(c0.895,33.23) -0.375,33.23 -0.375,1.02

## Polygon pours and split planes (outlines as drawn)
GND on L1(Signal) "NONET_L01_P-001" (solid, pour order 8): 28.575,14.95 25.75,14.95 ccw(c25.75,14.75) 25.55,14.75 25.55,12.775 cw(c25.225,12.775) 25.225,12.45 22.575,12.45 ccw(c22.575,12.225) 22.35,12.225 22.35,10.275 cw(c22.2,10.275) 22.2,10.125 ccw(c22.2,9.95) 22.025,9.95 22.025,8.575 23.7,8.575 cw(c23.7,7.65) 24.625,7.65 24.625,6.6 ccw(c25.025,6.6) 25.025,6.2 26.525,6.2 ccw(c26.525,6.75) 27.075,6.75 27.075,12.525 27.65,12.525 ccw(c27.65,13.45) 28.575,13.45
+3V3 on L1(Signal) "NONET_L01_P-001" (solid, pour order 3): 18.775,1.8 22.775,1.8 22.775,3.4 22.675,3.4 22.675,3.9 26.875,3.9 26.875,5.8 23.975,5.8 21.475,5.8 21.475,10.2 19.675,10.2 19.675,5.6 18.675,5.6 18.675,5.5 18.775,5.5 18.775,3.2
VBUS on L1(Signal) "NONET_L01_P-001" (solid, pour order 2): 31.575,18.2 31.575,18.8 31.475,18.7 27.275,18.7 27.275,15.4 28.875,15.4 28.875,18.2
+5V on L1(Signal) "NONET_L01_P-001" (solid, pour order 1): 17.375,8.4 17.075,8.7 17.075,11.7 18.675,11.7 19.775,12.8 25.475,18.5 25.475,18.6 26.975,18.6 27.075,18.5 27.075,15.3 26.975,15.2 25.575,15.2 23.275,12.9 23.275,12.8 22.575,12.8 21.875,12.1 21.875,10.6 19.775,10.6 19.075,9.9 19.075,8.4
GND on L3(GND) "NONET_L01_P-001" (solid, pour order 7): 0.075,31.56 cw(c2.615,31.56) 2.615,34.1 33.475,34.1 cw(c33.475,32.5) 35.075,32.5 35.075,1.7 cw(c33.375,1.7) 33.375,0 5.475,0 cw(c5.475,0.1) 5.375,0.1 ccw(c5.075,0.1) 5.075,0.4 0.575,0.4 cw(c0.575,0.9) 0.075,0.9 0.075,16
GND on L3(GND) "NONET_L01_P-001" (solid, pour order 6): 9.375,108.06 cw(c11.915,108.06) 11.915,110.6 42.775,110.6 cw(c42.775,109) 44.375,109 44.375,78.2 cw(c42.675,78.2) 42.675,76.5 14.775,76.5 cw(c14.775,76.6) 14.675,76.6 ccw(c14.375,76.6) 14.375,76.9 9.875,76.9 cw(c9.875,77.4) 9.375,77.4 9.375,92.5
GND on L3(GND) "NONET_L01_P-001" (solid, pour order 5): 1.975,136.26 cw(c4.515,136.26) 4.515,138.8 35.375,138.8 cw(c35.375,137.2) 36.975,137.2 36.975,106.4 cw(c35.275,106.4) 35.275,104.7 7.375,104.7 cw(c7.375,104.8) 7.275,104.8 ccw(c6.975,104.8) 6.975,105.1 2.475,105.1 cw(c2.475,105.6) 1.975,105.6 1.975,120.7
GND on L2(GND) "NONET_L01_P-001" (solid, pour order 4): 0.175,31.56 cw(c2.715,31.56) 2.715,34.1 33.575,34.1 cw(c33.575,32.5) 35.175,32.5 35.175,1.7 cw(c33.475,1.7) 33.475,0 5.575,0 cw(c5.575,0.1) 5.475,0.1 ccw(c5.175,0.1) 5.175,0.4 0.675,0.4 cw(c0.675,0.9) 0.175,0.9 0.175,16

## Silkscreen, mask and mechanical layers (free items; w line width, h text height)
Top Overlay:
  text "MPU" at 3.822,30.011 h1.52 r1.63
  text "SWD" at 21.054,22.779 h1.52
  text "STM32F4" at 8.754,12.554 h1.2
  text "USB_Conn" at 28.056,12.04 h1.52 r90
  text "GPIO" at 0.604,5.904 h1.2

## Text inside footprints (layer, text, board x,y; h text height)
D1: Top 3D Body "+" at 26.492,5.508 h0.5
D2: Top 3D Body "+" at 15.992,16.258 h0.5